# Altium PCB PCB1.PcbDoc
Units mil, origin at the board's own origin, x right, y up, seen from the top; angles counter-clockwise.
Board outline 5290.03 x 4800.03 mil, 2 copper layers (Top Layer, Bottom Layer); 69 components, 54 nets, 202 pads, 42 vias.
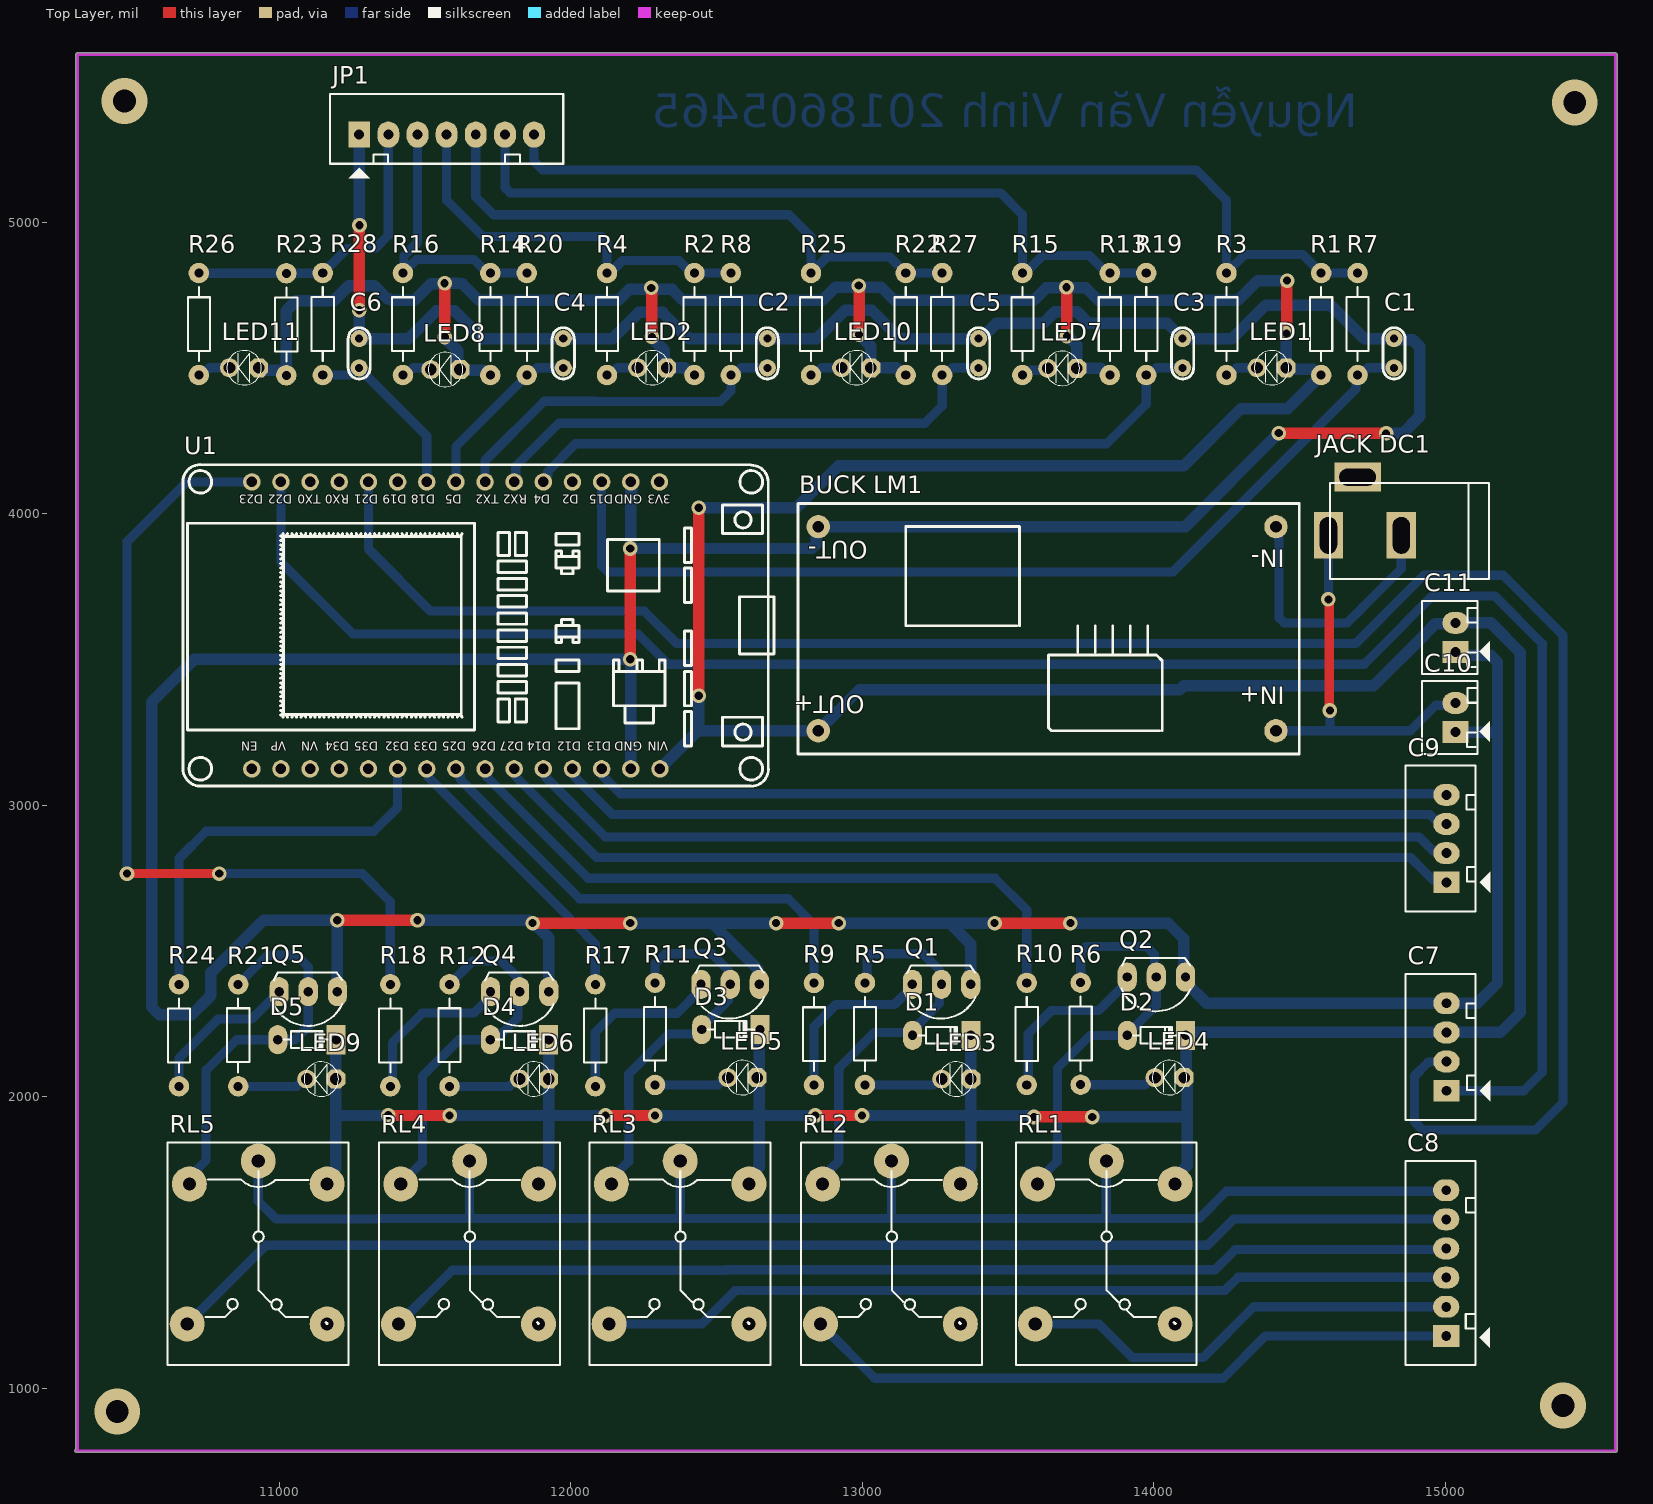
[diagram p0: Top Layer view]
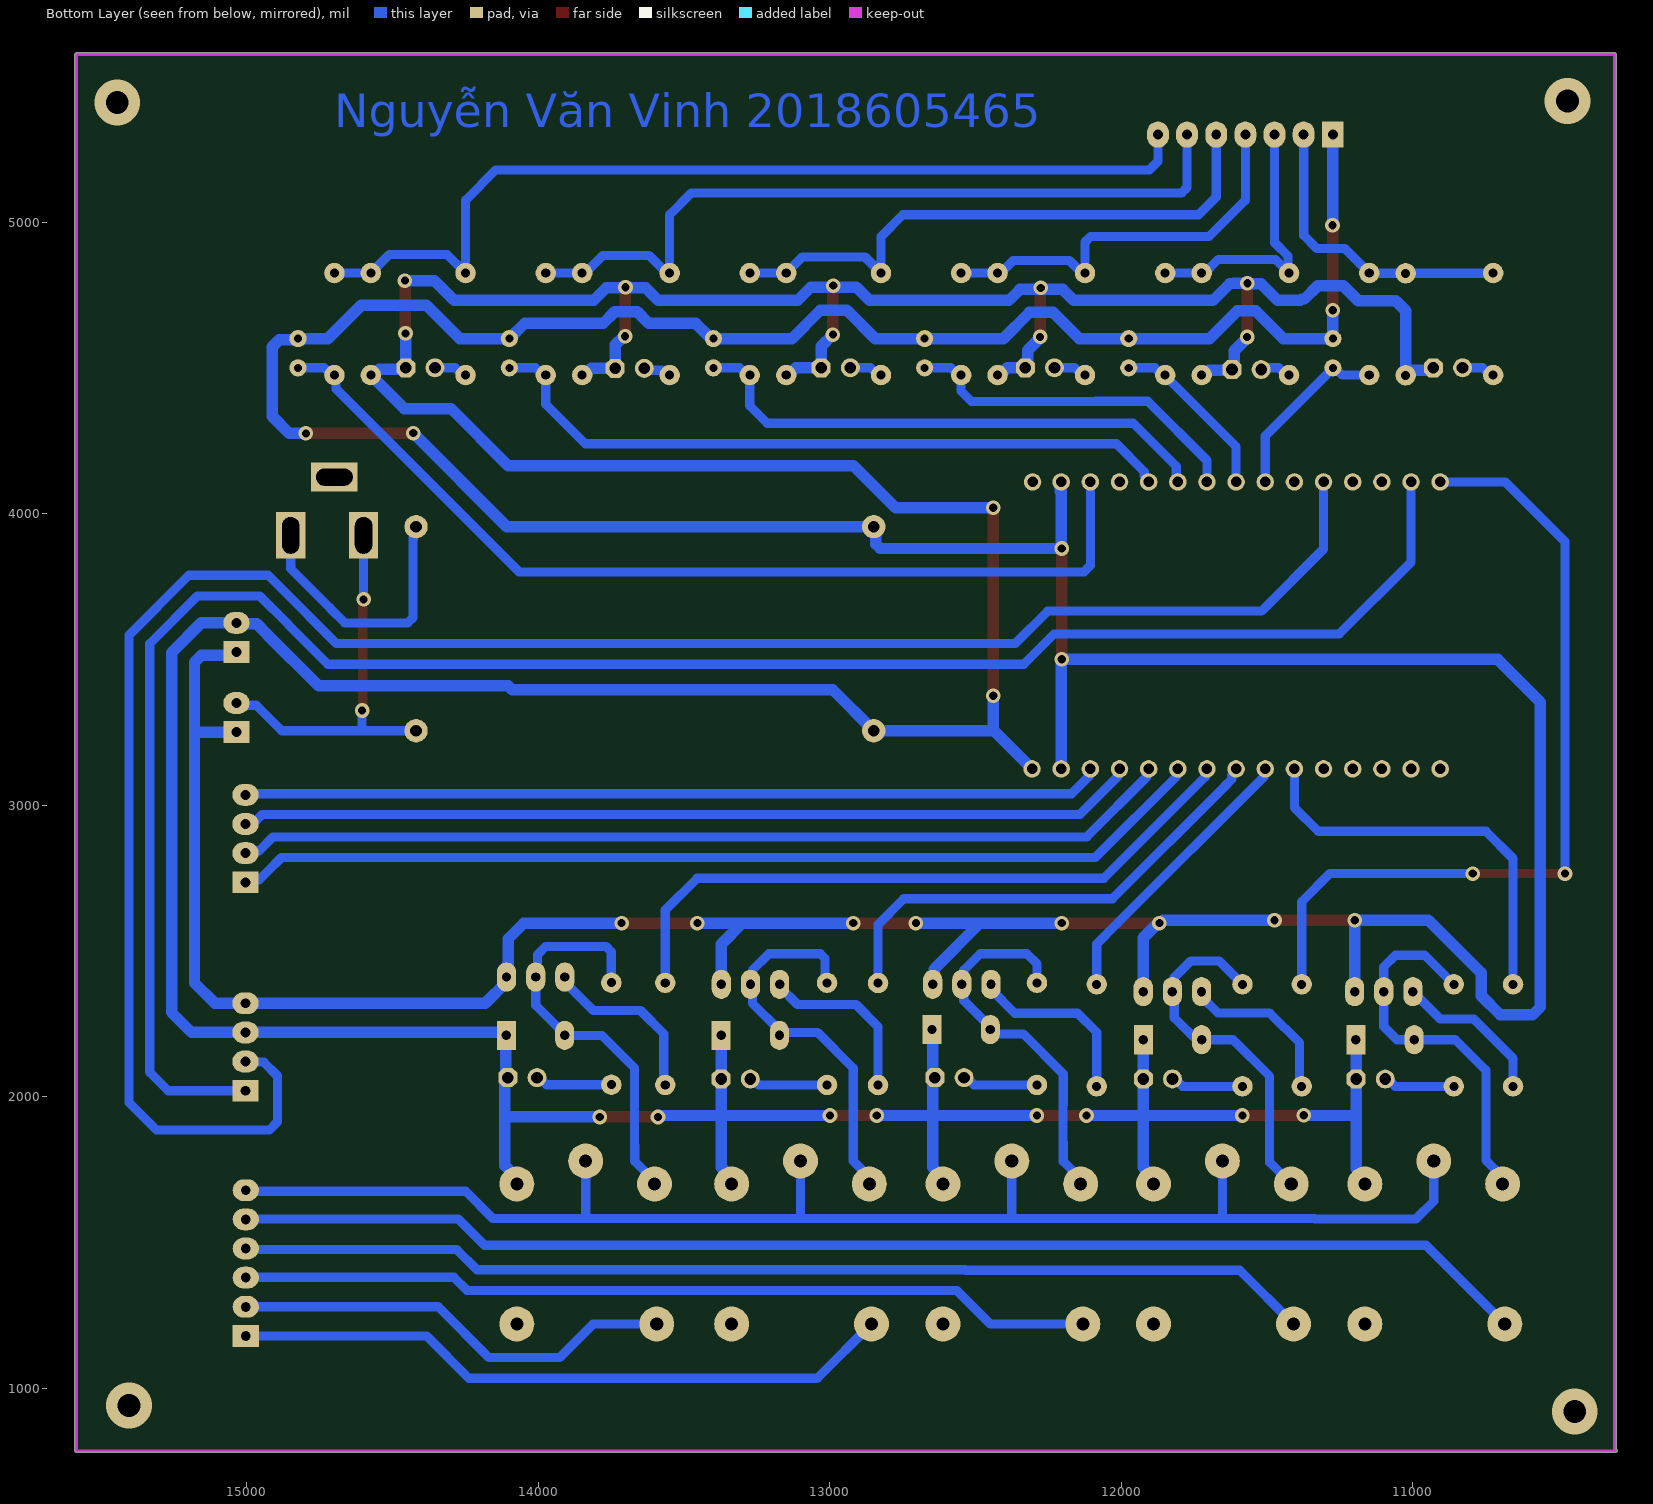
[diagram p1: Bottom Layer view, seen from below]
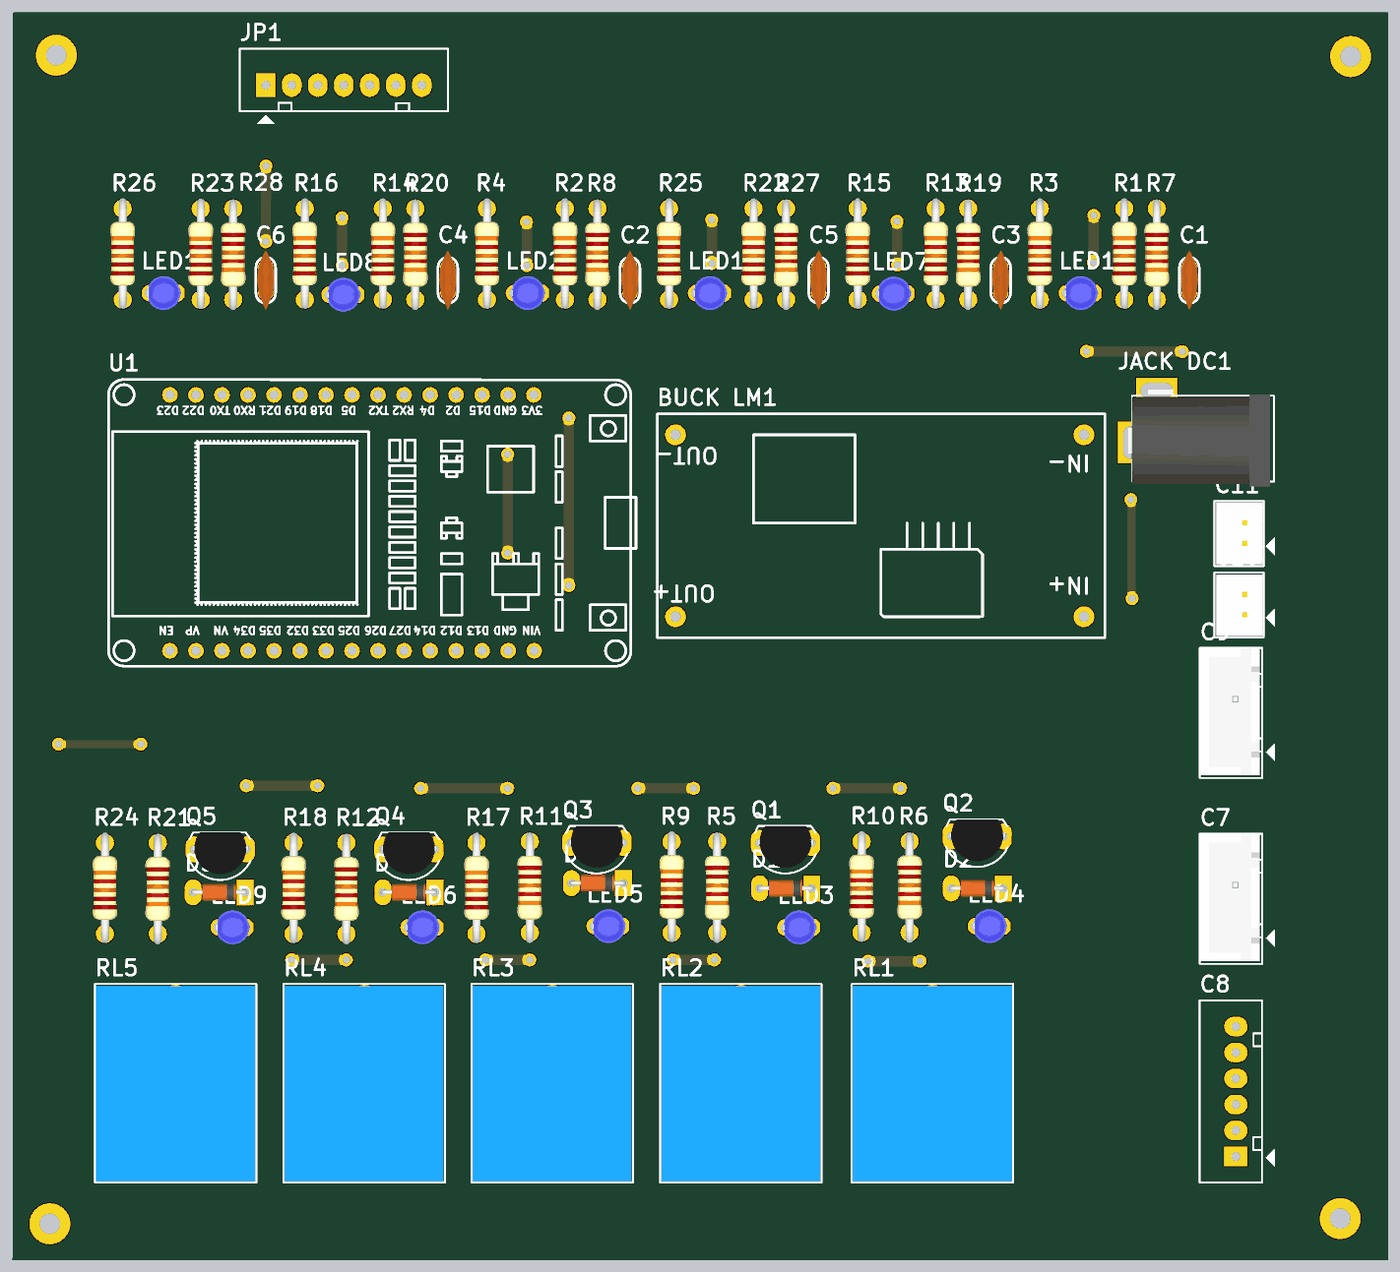
[diagram p2: 3D render of the assembled board from above, using the file's embedded part models]

## Layer stack, top to bottom
Top Solder: solder mask 0.4, Solder Resist, Dk 3.5
Top Layer: signal copper 1.4
Dielectric 1: dielectric 12.6, FR-4, Dk 4.8
Bottom Layer: signal copper 1.4
Bottom Solder: solder mask 0.4, Solder Resist, Dk 3.5

## Board outline
10302.98,789.59 ccw(c10305,785) 10305,779.99 15585,779.99 ccw(c15585,785) 15590.01,785 15590.01,5575 ccw(c15585,5575) 15585,5580.02 10308,5580.02 ccw(c10308,5575) 10302.99,5575

## Design rules (kind name [scope] priority, off if disabled: settings)
Clearance [All] p1: gap=39.37 ignorepadtopadclearanceinfootprint=FALSE
PolygonConnect [All] p1: connectstyle=Relief reliefconductorwidth=10 reliefentries=4 polygonreliefangle="90 Angle" airgapwidth=10
RoutingVias [All] p1: holewidth=28 width=50 viastyle="Through Hole" minholewidth=28 minwidth=50 maxholewidth=28 maxwidth=50
SolderMaskExpansion [All] p1: expansion=4 istentingtop=FALSE
Width GND_ISO [InNet('GND_ISO')] p1: maxlimit=39.37 minlimit=39.37 preferedwidth=39.37
Width COM_O_1 [InNet('COM_O_1')] p2: maxlimit=59.06 minlimit=59.06 preferedwidth=59.06
Width COM_O_2 [InNet('COM_O_2')] p3: maxlimit=59.06 minlimit=59.06 preferedwidth=59.06
Width VCC_ISO [InNet('VCC5_ISO')] p4: maxlimit=39.37 minlimit=39.37 preferedwidth=39.37
Width GND [InNet('GND')] p5: maxlimit=39.37 minlimit=39.37 preferedwidth=39.37
Width VCC [InNet('VCC5')] p6: maxlimit=39.37 minlimit=39.37 preferedwidth=39.37
Width SIGNAL [All] p7: maxlimit=31.5 minlimit=31.5 preferedwidth=31.5
30 further rules are at their usual default settings.

## Components (designator, comment, footprint, x,y, rotation, side; value= is the part's Value field where it differs from the comment)
"BUCK LM1" "Buck LM2596" "BUCK LM2596" 13650,3575 r180 top
C1 "104" "tu gom" 14825,4550 r90 top
C2 "104" "tu gom" 12675,4550 r90 top
C3 "104" "tu gom" 14100,4550 r90 top
C4 "104" "tu gom" 11975,4550 r90 top
C5 "104" "tu gom" 13400,4550 r90 top
C6 "104" "tu gom" 11275,4550 r90 top
C7 "LCD_I2C" Header4 15005,2020 r90 top
C8 "Header6" Header6 15004,1178.74 r90 top
C9 "L298N IN" Header4 15005,2735 r90 top
C10 "Header2" Header2 15036,3250 r90 top
C11 "Header2" Header2 15036,3525 r90 top
D1 "100v" "DIODE 0.5A" 13273.22,2210 r180 top
D2 "100v" "DIODE 0.5A" 14010,2210 r180 top
D3 "100v" "DIODE 0.5A" 12550,2230 r180 top
D4 "100v" "DIODE 0.5A" 11825,2195 r180 top
D5 "100v" "DIODE 0.5A" 11095.78,2195 r180 top
"JACK DC1" "JACK DC 5.5" "JACK DC 5.5" 14725,4025 r180 top value="Jac DC"
JP1 "JP7" Header7 11275,5300 r0 top value="Connector 7"
LED1 "LED 3mm" LED-3MM-BLUE 14400,4500 r180 top
LED2 "LED 3mm" LED-3MM-BLUE 12275,4500 r180 top
LED3 "LED 3mm" LED-3MM-BLUE 13318.22,2060 r180 top
LED4 "LED 3mm" LED-3MM-BLUE 14050,2065 r180 top
LED5 "LED 3mm" LED-3MM-BLUE 12585,2065 r180 top
LED6 "LED 3mm" LED-3MM-BLUE 11870,2060.36 r180 top
LED7 "LED 3mm" LED-3MM-BLUE 13682,4498 r180 top
LED8 "LED 3mm" LED-3MM-BLUE 11566,4494 r180 top
LED9 "LED 3mm" LED-3MM-BLUE 11140,2060 r180 top
LED10 "LED 3mm" LED-3MM-BLUE 12975,4500 r180 top
LED11 "LED 3mm" LED-3MM-BLUE 10875,4500 r180 top
Q1 "C1815" C1815_cam 13272.72,2385 r180 top
Q2 "C1815" C1815_cam 14009.5,2410 r180 top
Q3 "C1815" C1815_cam 12547.72,2385 r180 top
Q4 "C1815" C1815_cam 11825.28,2360 r180 top
Q5 "C1815" C1815_cam 11100.28,2360 r180 top
R1 "10K" R1/4W 14575,4825 r270 top value="R1/4W - 1K"
R2 "10K" R1/4W 12425,4825 r270 top value="R1/4W - 1K"
R3 "220R" R1/4W 14250,4825 r270 top value="R1/4W - 1K"
R4 "220R" R1/4W 12125,4825 r270 top value="R1/4W - 1K"
R5 "510R" R1/4W 13010,2040 r90 top value="R1/4W - 1K"
R6 "510R" R1/4W 13750,2040.6 r90 top value="R1/4W - 1K"
R7 "1K" R1/4W 14700,4475 r90 top value="R1/4W - 1K"
R8 "1K" R1/4W 12550,4475 r90 top value="R1/4W - 1K"
R9 "510R" R1/4W 12835,2389.4 r270 top value="R1/4W - 1K"
R10 "510R" R1/4W 13565,2390 r270 top value="R1/4W - 1K"
R11 "510R" R1/4W 12290,2040 r90 top value="R1/4W - 1K"
R12 "510R" R1/4W 11585,2035 r90 top value="R1/4W - 1K"
R13 "10K" R1/4W 13850,4825 r270 top value="R1/4W - 1K"
R14 "10K" R1/4W 11725,4825 r270 top value="R1/4W - 1K"
R15 "220R" R1/4W 13550,4825 r270 top value="R1/4W - 1K"
R16 "220R" R1/4W 11425,4825 r270 top value="R1/4W - 1K"
R17 "510R" R1/4W 12085,2385 r270 top value="R1/4W - 1K"
R18 "510R" R1/4W 11381.68,2385 r270 top value="R1/4W - 1K"
R19 "1K" R1/4W 13975,4475 r90 top value="R1/4W - 1K"
R20 "1K" R1/4W 11850,4475 r90 top value="R1/4W - 1K"
R21 "510R" R1/4W 10860,2035 r90 top value="R1/4W - 1K"
R22 "10K" R1/4W 13150,4825 r270 top value="R1/4W - 1K"
R23 "10K" R1/4W 11025,4824.04 r270 top value="R1/4W - 1K"
R24 "510R" R1/4W 10656.68,2385 r270 top value="R1/4W - 1K"
R25 "220R" R1/4W 12825,4825 r270 top value="R1/4W - 1K"
R26 "220R" R1/4W 10725,4825 r270 top value="R1/4W - 1K"
R27 "1K" R1/4W 13275,4475 r90 top value="R1/4W - 1K"
R28 "1K" R1/4W 11150,4475 r90 top value="R1/4W - 1K"
RL1 "Relay" RELAY_SRA_05VDC_SL_C 13838,1778.74 r270 top
RL2 "Relay" RELAY_SRA_05VDC_SL_C 13101.22,1778.74 r270 top
RL3 "Relay" RELAY_SRA_05VDC_SL_C 12376.22,1778.74 r270 top
RL4 "Relay" RELAY_SRA_05VDC_SL_C 11653.78,1778.74 r270 top
RL5 "Relay" RELAY_SRA_05VDC_SL_C 10928.78,1778.74 r270 top
U1 "ESP32_MODULE copy" ESP32-WIFIMODULE-FOOTPRINT 11675,3700 r90 top

## Footprints (in the part's own frame and the unit in brackets; to place one, negate y for a bottom-side part, rotate by r counter-clockwise, add the part's x,y. Pads: shape width x height; smd on the part's side, far side on the other; paste and mask are expansions set on the pad)
"BUCK LM2596" [mil]
  round 80 hole 40: 1(-770,320) 2(-770,-380) 3(800,-380) 4(800,320)
  silkscreen extent -850,-460 870,400
C1815_cam [mil]
  oval 66x100 hole 32: 1(-100,0) 2(0,0) 3(100,0)
  silkscreen extent -117,-65 120,118, body extent -109,-66 109,95, height 245
"DIODE 0.5A" [mil] "Diode muoi, xung"
  oval 65x100 hole 32: 1(100,0)
  rect 65x100 hole 32: 2(-100,0)
  silkscreen extent -80,-30 80,28, body extent -108,-33 108,32, height 61
ESP32-WIFIMODULE-FOOTPRINT [mil]
  round 60 hole 36: 1(-575.9,768.25) 2(-575.9,668.25) 3(-575.9,568.25) 4(-575.9,468.25) 5(-575.9,368.25) 6(-575.9,268.25) 7(-575.9,168.25) 8(-575.9,68.25) 9(-575.9,-31.75) 10(-575.9,-131.75) 11(-575.9,-231.75) 12(-575.9,-331.75) 13(-575.9,-431.75) 14(-575.9,-531.75) 15(-575.9,-631.75) 16(408.35,-630.18) 17(408.35,-531.75) 18(408.35,-431.75) 19(408.35,-331.75) 20(408.35,-231.75) 21(408.35,-131.75) 22(408.35,-31.75) 23(408.35,68.25) 24(408.35,168.25) 25(408.35,268.25) 26(408.35,368.25) 27(408.35,468.25) 28(408.35,568.25) 29(408.35,668.25) 30(408.35,768.25)
  silkscreen extent -635,-1023 468,1005
Header2 [mil] "CON2"
  rect 75x90 hole 34: 1(0,0)
  oval 75x90 hole 34: 2(100,0)
  silkscreen extent -75,-118 175,115, body extent -68,-70 168,107, height 236
Header4 [mil] "CON4"
  rect 75x90 hole 34: 1(0,0)
  oval 75x90 hole 34: 2(100,0) 3(200,0) 4(300,0)
  silkscreen extent -100,-150 400,140, body extent -90,-90 398,136, height 276
Header6 [mil] "CON6"
  rect 75x90 hole 34: 1(0,0)
  oval 75x90 hole 34: 2(100,0) 3(200,0) 4(300,0) 5(400,0) 6(500,0)
  silkscreen extent -100,-150 600,140
Header7 [mil] "CON7"
  rect 75x90 hole 34: 1(0,0)
  oval 75x90 hole 34: 2(100,0) 3(200,0) 4(300,0) 5(400,0) 6(500,0) 7(600,0)
  silkscreen extent -100,-150 700,140
"JACK DC 5.5" [mil] "Jac DC input"
  rect 100x160 hole 59.06 slot 125.98 at 90 deg: 1(125,100) 2(-125,100)
  rect 160x100 hole 59.06 slot 125.98 at 0 deg: 3(25,-100)
  silkscreen extent -425,-80 120,250, body extent -410,-105 134,269, height 434
LED-3MM-BLUE [mil]
  oct 65x65 hole 40: 1(-55,0)
  round 65 hole 40: 2(45,0)
  silkscreen extent -64,-59 54,59, body extent -72,-65 54,65, height 184
R1/4W [mil]
  round 70 hole 31: 1(0,0) 2(350,0)
  silkscreen extent 48,-38 302,38, body extent -40,-47 386,47, height 111
RELAY_SRA_05VDC_SL_C [mil] "Relay SPDT, 5 pin, 10A,W 650mil, L 800mil, H 800mil"
  round 120 hole 45: 1(559.06,-243.78) 2(559.06,236.22) 3(78.74,236.22) 4(0,0) 5(78.74,-236.22)
  silkscreen extent -63,-311 700,310, body extent -55,-306 697,304, height 602
"tu gom" [mm] "Tu gom mini"
  round 1.5 hole 0.7: 1(-1.27,0) 2(1.27,0)
  silkscreen extent -2.25,-0.97 2.22,0.97, body extent -2.92,-0.85 2.92,0.85, height 6.12

## Part data
C1 C2 C3 C4 C5 C6: library part "Tu gom 104 50V", "Cắm", Chung_Loai=Cắm, Don_Vi=Con, Ma_Hang=MH004761, So_Chan=2, Ten_Linh_Kien="Tụ gốm 104 100nF 50V"
C7 C9: library part Header4, "Header IDC, 4 x 1 Pin Vertical 2.54mm Pitch (Non-Boxed, Male)", Manufacturer="W¨¹rth Elektronik eiSos GmbH", partNo=613002143121, ComponentLink1 Description=Manufacturer, ComponentLink1URL=http://www.we-online.com, ComponentLink2 Description=Datasheet, ComponentLink2URL=http://katalog.we-online.de/em/datasheet/6130xx143121.pdf, Created by="Karrer Zheng", Created Date="29 March 2013", NoPins=02
C8: "Header IDC, 6 x 1 Pin Vertical 2.54mm Pitch (Non-Boxed, Male)", Manufacturer="W¨¹rth Elektronik eiSos GmbH", partNo=613002143121, ComponentLink1 Description=Manufacturer, ComponentLink1URL=http://www.we-online.com, ComponentLink2 Description=Datasheet, ComponentLink2URL=http://katalog.we-online.de/em/datasheet/6130xx143121.pdf, Created by="Karrer Zheng", Created Date="29 March 2013", NoPins=02
C10 C11: "Header IDC, 2 x 1 Pin Vertical 2.54mm Pitch (Non-Boxed, Male)", Manufacturer="W¨¹rth Elektronik eiSos GmbH", partNo=613002143121, ComponentLink1 Description=Manufacturer, ComponentLink1URL=http://www.we-online.com, ComponentLink2 Description=Datasheet, ComponentLink2URL=http://katalog.we-online.de/em/datasheet/6130xx143121.pdf, Created by="Karrer Zheng", Created Date="29 March 2013", NoPins=02
D1 D2 D3 D4 D5: library part "Diode 1N4148", "Cắm", Chung_Loai=Cắm, Don_Vi=Con, Ma_Hang=MH001065, Ten_Linh_Kien="Diode 1N4148 DO35 450mA 100V ( 1N4148 DIP)"
JP1: library part Header7, "Connector 7"
LED1 LED2 LED3 LED4 LED5 LED6 LED7 LED8 LED9 LED10 LED11: library part "LED 3mm Xanh Duong", "Cắm", Chung_Loai=Cắm, Don_Vi=Con, Ma_Hang=MH009003, Ten_Linh_Kien="LED 3MM Xanh Dương SS (1000c)"
Q1 Q2 Q3 Q4 Q5: "NPN 600mW, ECB"
R1 R2 R3 R4 R5 R6 R7 R8 R9 R10 R11 R12 R13 R14 R15 R16 R17 R18 R19 R20 R21 R22 R23 R24 R25 R26 R27 R28: library part R1/4W, "Resistor 1/4W"
RL1 RL2 RL3 RL4 RL5: library part RL_SRA-05VDC-SL-C, "Relay 5 Chan", Ma_Hang=MH009374, Ten="Relay 5V10A SRD-05VDC-SL-C Chính Hãng"

## Via types
v1: diameter 50, hole 28, Top Layer to Bottom Layer, 38 vias
v2: diameter 157.48, hole 78.74, Top Layer to Bottom Layer, 4 vias

## Nets (pads, with @x,y where several pads share a name; then routed paths per layer and width w, separated by ;. In a path a pad name is that pad's centre, name@x,y a point inside that pad or via, vN(x,y) a via of type N, cw(c..) or ccw(c..) an arc to the next point about the centre after c; other vN are vias at no path point)
COM_O: C8.6 RL1.4 RL2.4 RL3.4 RL4.4 RL5.4 | length 5066.8
  Bottom Layer w31.5: RL5.4 10928.78,1641.22 10990,1580 11336.02,1580 11337.76,1581.73 11653.78,1581.73 ; RL4.4 11653.78,1581.73 ; RL3.4 12376.22,1581.73 ; RL2.4 13101.22,1581.73 ; RL1.4 13838,1584.88 13834.85,1581.73 ; C8.6@15004,1675 14250,1675 14156.73,1581.73 13834.85,1581.73 ; 11653.78,1581.73 12376.22,1581.73 ; 12376.22,1581.73 13101.22,1581.73 ; 13101.22,1581.73 13834.85,1581.73
GND: "BUCK LM1.3" C1.2 C2.2 C3.2 C4.2 C5.2 C6.2 C7.4 C10.1 C11.1 JP1.1 Q1.1 Q2.1 Q3.1 Q4.1 Q5.1 U1.14 U1.17 | length 19112.7
  Top Layer w39.37: v1(11200,2605) v1(11475,2605) ; v1(11275.12,4697.25) 11275.12,4859.12 11276,4860 v1(11276,4989.12) ; v1(11870,2595) v1(12205,2595) ; v1(12205,3500) v1(12205,3880.12) ; v1(12705,2595) v1(12920,2595) ; v1(13455,2595) v1(13715,2595) ; v1(14429.47,4275.94) 14429.94,4275.47 14797.4,4275.47 v1(14797.88,4275)
  Bottom Layer w39.37: Q5.1 11200.28,2604.72 v1(11200,2605) 10946.99,2605 10765.94,2423.96 10765.94,2345.94 10700,2280 10590,2280 10562.62,2307.38 10562.62,3352.62 10710,3500 v1(12205,3500) 12205.88,3499.12 12205.88,3124.97 U1.14 ; JP1.1 11275.5,5299.5 11275.5,4989.62 v1(11276,4989.12) ; v1(11275.12,4697.25) 11275,4697.13 C6.2 11444.37,4600 11539.37,4695 11603,4695 11698,4600 C4.2 12144.37,4600 12234.42,4690.06 12315.58,4690.06 12405.63,4600 C2.2 12844.37,4600 12942.42,4698.06 13032.58,4698.06 13130.63,4600 C5.2 13405.33,4600 C5.2@13409.09,4603.77 ; v1(11475,2605) 11857.12,2605 11867.12,2595 11872.88,2595 11878.19,2589.69 11880.31,2589.69 11925.28,2544.72 Q4.1 ; v1(12205,2595) 12485.13,2595 ; 12205.88,4076.88 12205.88,3880.99 v1(12205,3880.12) 12826.94,3880.12 12842.23,3895.41 12842.23,3947.23 12850,3955 14108.53,3955 v1(14429.47,4275.94) ; U1.17 12210.7,4104.4 12210.7,4076.88 ; Q3.1 12642.63,2390.1 12642.63,2437.5 12485.13,2595 ; v1(12705,2595) 12485.13,2595 ; v1(12920,2595) 13300,2595 ; Q1.1 13372.72,2522.28 13300,2595 ; C5.2@13417.84,4609.84 13460.2,4652.2 13621.57,4652.2 13661.37,4692 13738.63,4692 13778.43,4652.2 14047.8,4652.2 C3.2 14269.37,4600 14384.31,4714.94 14608.06,4714.94 14723,4600 C1.2 14828.77,4596.23 14889.29,4596.23 14913.58,4571.94 14913.58,4333.58 14855,4275 v1(14797.88,4275) ; v1(13455,2595) 13300,2595 ; v1(13715,2595) 14050,2595 14104.4,2540.6 14104.4,2415.1 Q2.1 14109.5,2393 14182.5,2320 15110,2320 15179.92,2389.92 15179.92,3250 ; C10.1 15179.92,3250 ; C11.1 15047.64,3513.36 15156.86,3513.36 15179.92,3490.3 15179.92,3250
IN_1: C1.1 R7.1 U1.18 | length 3328.3
  Bottom Layer w31.5: U1.18 12106.75,3821.7 12128.45,3800 14066.83,3800 14694.26,4427.43 14694.26,4469.26 R7.1 14710.42,4475 14735.42,4500 C1.1
IN_2: C3.1 R19.1 U1.20 | length 2426
  Bottom Layer w31.5: U1.20 11906.75,4116.06 11921.63,4130.94 11921.63,4143.6 12017.16,4239.13 13839.13,4239.13 13975,4375 R19.1 13985.42,4475 14010.42,4500 C3.1
IN_3: C5.1 R27.1 U1.21 | length 1845.3
  Bottom Layer w31.5: U1.21 11812.21,4113.8 11812.21,4162.21 11960,4310 13215,4310 13275,4370 R27.1 13285.42,4475 13310.42,4500 C5.1
IN_4: C2.1 R8.1 U1.22 | length 1205.8
  Bottom Layer w31.5: U1.22 11706.75,4181.75 11910,4385 12087.55,4385 12087.67,4384.88 12514.88,4384.88 12550,4420 R8.1 12560.42,4475 12585.42,4500 C2.1
IN_5: C4.1 R20.1 U1.23 | length 602.8
  Bottom Layer w31.5: U1.23 11606.75,4229.31 11850,4472.55 R20.1 11860.42,4475 11885.42,4500 C4.1
IN_6: C6.1 R28.1 U1.24 | length 623
  Bottom Layer w31.5: R28.1 11242.54,4475 11267.54,4500 C6.1 11275,4497.55 11506.75,4265.8 U1.24
L298_INA: C9.4 U1.13 | length 2925.2
  Bottom Layer w31.5: U1.13 12112.21,3118.64 12112.21,3098.27 12121.63,3088.84 12171.49,3038.98 C9.4@14984.73,3038.98
L298_INB: C9.3 U1.12 | length 3088.6
  Bottom Layer w31.5: U1.12 12012.21,3118.64 12012.21,3098.05 12142.14,2968.11 14947.41,2968.11 14953.79,2961.73 14954.01,2961.73 14972.41,2943.32 14996.68,2943.32 C9.3
L298_INC: C9.2 U1.11 | length 3230.2
  Bottom Layer w31.5: U1.11 11912.21,3118.64 11912.21,3097.83 12119.17,2890.87 14910.65,2890.87 14958.19,2843.32 14977.4,2843.32 14985.73,2835 C9.2
L298_IND: C9.1 U1.10 | length 3371.7
  Bottom Layer w31.5: U1.10 11812.21,3118.64 11812.21,3097.61 12089.81,2820 14881.3,2820 14929.78,2771.52 14930,2771.52 14959.14,2742.38 14997.62,2742.38 C9.1
"NetBUCK LM1_2": "BUCK LM1.2" "JACK DC1.2" | length 934.6
  Bottom Layer w31.5: 14420,3955 14429.28,3945.72 14429.28,3913.02 14430,3912.3 14430,3643.45 14448.45,3625 14664.38,3625 14715.41,3676.03 14715.41,3676.65 14850,3811.24 14850,3925
NetD1_1: D1.1 Q1.2 R5.2 RL2.5 | length 1341.6
  Bottom Layer w31.5: RL2.5 12865,1723.95 12919.88,1778.83 12919.88,2097.33 13042.55,2220 13163.22,2220 D1.1 13173.22,2227.5 13266.12,2320.4 13266.12,2378.4 Q1.2 13266.12,2391.6 13266.12,2433.22 13209.22,2490.12 13033.45,2490.12 13017.37,2474.04 13017.37,2417.37 R5.2@13010,2410
NetD2_1: D2.1 Q2.2 R6.2 RL1.5 | length 1414.6
  Bottom Layer w31.5: RL1.5 13601.78,1710 13669.88,1778.1 13669.88,1833.1 13670.12,1833.34 13670.12,2097.56 13782.55,2210 D2.1 13910,2218.43 13925.48,2233.91 13930.65,2233.91 14009.5,2312.76 Q2.2 14002.9,2416.6 14002.9,2487.1 13974.88,2515.12 13768.45,2515.12 13750,2496.67 R6.2
NetD3_1: D3.1 Q3.2 R11.2 RL3.5 | length 1316.1
  Bottom Layer w31.5: RL3.5 12140,1717.7 12199.88,1777.58 12199.88,1842.58 12200.12,1842.82 12200.12,1972.46 12199.88,1972.69 12199.88,2077.33 12337.55,2215 12434.52,2215 12450,2230.48 12450,2238.43 12541.12,2329.55 12541.12,2378.4 Q3.2 12541.12,2391.6 12541.12,2433.22 12484.22,2490.12 12325.12,2490.12 12290,2455 R11.2
NetD4_1: D4.1 Q4.2 R12.2 RL4.5 | length 1238.6
  Bottom Layer w31.5: RL4.5 11491.78,1774.22 11491.78,2069.22 11617.55,2195 D4.1 ; R12.2 11665.12,2465.12 11761.78,2465.12 11818.68,2408.22 11818.68,2366.6 Q4.2 11818.68,2353.4 11818.68,2270.4 D4.1@11734.14,2185.86
NetD5_1: D5.1 Q5.2 R21.2 RL5.5 | length 1329.1
  Bottom Layer w31.5: RL5.5 10692.56,1723.95 10750,1781.39 10750,2090 10855,2195 D5.1 11055,2195 11100.28,2240.28 Q5.2 11100.28,2444.72 11060,2485 10960,2485 R21.2
NetLED1_2: LED1.2 R3.2 | length 115.4
  Bottom Layer w31.5: R3.2 14260.42,4475 14285.42,4500 LED1.2
NetLED2_2: LED2.2 R4.2 | length 115.4
  Bottom Layer w31.5: R4.2 12135.42,4475 12160.42,4500 LED2.2
NetLED3_2: LED3.2 R5.1 | length 271.5
  Bottom Layer w31.5: R5.1 13244.15,2040 13264.15,2060 LED3.2
NetLED4_2: LED4.2 R6.1 | length 265.1
  Bottom Layer w31.5: R6.1 13971.53,2040.6 13995.93,2065 LED4.2
NetLED5_2: LED5.2 R11.1 | length 260.4
  Bottom Layer w31.5: R11.1 12505.93,2040 12530.93,2065 LED5.2
NetLED6_2: LED6.2 R12.1 | length 251.7
  Bottom Layer w31.5: R12.1@11585.87,2035.87 R12.1 11790.58,2035 11815.93,2060.36 LED6.2
NetLED7_2: LED7.2 R15.2 | length 96.5
  Bottom Layer w31.5: R15.2 13560.42,4475 13577.01,4491.59 13630.59,4491.59 LED7.2
NetLED8_2: LED8.2 R16.2 | length 106.3
  Bottom Layer w31.5: R16.2 11435.42,4475 11460.42,4500 LED8.2@11520.93,4500
NetLED9_2: LED9.2 R21.1 | length 245.4
  Bottom Layer w31.5: R21.1 11060.93,2035 11085.93,2060 LED9.2
NetLED10_2: LED10.2 R25.2 | length 115.4
  Bottom Layer w31.5: R25.2 12835.42,4475 12860.42,4500 LED10.2
NetLED11_2: LED11.2 R26.2 | length 115.4
  Bottom Layer w31.5: R26.2 10735.42,4475 10760.42,4500 LED11.2
NetQ1_3: Q1.3 R9.2 | length 587.5
  Bottom Layer w31.5: R9.2@12835,2055 12835,2240 12910.7,2315.7 13111.54,2315.7 13172.72,2376.88 Q1.3
NetQ2_3: Q2.3 R10.2 | length 592.3
  Bottom Layer w31.5: R10.2@13565,2055 13570,2060 13570,2215 13650,2295 13811.5,2295 13909.5,2393 Q2.3
NetQ3_3: Q3.3 R17.2 | length 601
  Bottom Layer w31.5: R17.2@12085,2060 12085,2220 12150.87,2285.87 12365.59,2285.87 12447.72,2368 Q3.3
NetQ4_3: Q4.3 R18.2 | length 571.2
  Bottom Layer w31.5: R18.2 11389.05,2042.37 11389.05,2184.05 11491.26,2286.26 11668.54,2286.26 11725.28,2343 Q4.3
NetQ5_3: Q5.3 R24.2 | length 538.9
  Bottom Layer w31.5: R24.2 10656.68,2130.89 10791.65,2265.87 10906.15,2265.87 10976.68,2336.4 10984.34,2336.4 11000.28,2352.34 Q5.3
OUT_1: R9.1 U1.8 | length 1647.1
  Bottom Layer w31.5: U1.8 11606.75,3116.38 11621.63,3101.5 11621.63,3088.84 11646.73,3063.74 11646.73,3062.64 12031.1,2678.27 12746.73,2678.27 12835,2590 R9.1@12835,2405
OUT_2: R17.1 U1.7 | length 978.6
  Bottom Layer w31.5: U1.7 11512.21,3118.64 11512.21,3096.1 12014.15,2594.15 12085,2523.3 R17.1
OUT_3: R24.1 U1.6 | length 1386.6
  Bottom Layer w31.5: R24.1 10656.68,2816.68 10750,2910 11325,2910 11406.75,2991.75 U1.6
OUT_4: R10.1 U1.9 | length 2306.2
  Bottom Layer w31.5: U1.9 11712.21,3118.64 11712.21,3097.39 12060.46,2749.13 13455.87,2749.13 13565,2640 R10.1@13565,2405
OUT_5: R18.1 U1.30 | length 2878.1
  Top Layer w31.5: v1(10478.57,2765) v1(10795,2765)
  Bottom Layer w31.5: v1(10478.57,2765) 10478.57,3903.57 10683.35,4108.35 U1.30 ; v1(10795,2765) 11285,2765 11381.47,2668.53 11381.47,2385.21 R18.1
OUT_BTN_1: JP1.7 R1.1 R3.1 R7.2 | length 3275.3
  Bottom Layer w31.5: JP1.7 11875,5207.76 11903.88,5178.88 14146.12,5178.88 14250,5075 R3.1 14314,4889 14511,4889 R1.1 R7.2
OUT_BTN_2: JP1.6 R13.1 R15.1 R19.2 | length 2670
  Bottom Layer w31.5: JP1.6 11775,5118.45 11793.45,5100 13475,5100 13550,5025 R15.1 13560.42,4825 13620.42,4885 13779.58,4885 13839.58,4825 R19.2
OUT_BTN_3: JP1.5 R22.1 R25.1 R27.2 | length 2040.9
  Bottom Layer w31.5: JP1.5 11675,5085.98 11735.98,5025 12750,5025 12825,4950 R25.1 12880,4880 13095,4880 R22.1 R27.2
OUT_BTN_4: JP1.4 R2.1 R4.1 R8.2 | length 1391.2
  Bottom Layer w31.5: JP1.4 11575,5075 11700,4950 12106.55,4950 12125,4931.55 R4.1 ; R4.1@12135.42,4825 12178.42,4868 12371.58,4868 12414.58,4825 R8.2
OUT_BTN_5: JP1.3 R14.1 R16.1 R20.2 | length 955.1
  Bottom Layer w31.5: R16.1 R16.1@11428.24,4828.24 ; JP1.3 11475,4930 11428.24,4883.24 R16.1@11428.24,4828.24 ; R20.2 11714.58,4825 11667.58,4872 11472,4872 R16.1@11428.24,4828.24
OUT_BTN_6: JP1.2 R23.1 R26.1 R28.2 | length 1050.1
  Bottom Layer w31.5: R26.1 10725.48,4824.52 11024.52,4824.52 R23.1 11025.48,4824.52 11149.52,4824.52 R28.2 11234,4909 11329.78,4909 11375,4954.22 JP1.2
OUT_RL1: C8.1 RL2.1 | length 2283.7
  Bottom Layer w31.5: RL2.1 13043.43,1033.7 14238.7,1033.7 14383.74,1178.74 C8.1
OUT_RL2: C8.3 RL3.1 | length 2915
  Bottom Layer w31.5: RL3.1 12449.64,1219.68 12564.76,1334.8 14244.8,1334.8 14290,1380 C8.3@14981.08,1380
OUT_RL3: C8.5 RL5.1 | length 4468.2
  Bottom Layer w31.5: RL5.1 10955.32,1490 14185,1490 14275,1580 C8.5@15004,1580
OUT_RL4: C8.2 RL1.1 | length 1529.6
  Bottom Layer w31.5: RL1.1 13812.48,1219.68 13927.6,1104.57 14169.57,1104.57 14343.74,1278.74 C8.2
OUT_RL5: C8.4 RL4.1 | length 3699.8
  Bottom Layer w31.5: RL4.1 11594.45,1404.13 12533.87,1404.13 12535.4,1405.67 14210.67,1405.67 14280,1475 C8.4@15004,1475
SCL: C7.1 U1.29 | length 6737.2
  Bottom Layer w31.5: U1.29 11006.75,3833.25 11252.69,3587.31 12230.99,3587.31 12335.04,3483.27 14723.09,3483.27 14857.14,3617.32 14857.14,3617.95 14956.81,3717.62 15169.75,3717.62 15333.46,3553.9 15333.46,2083.46 15270,2020 C7.1
SDA: C7.2 U1.26 | length 7096
  Bottom Layer w31.5: U1.26 11306.75,3878.25 11519.8,3665.2 12253.32,3665.2 12364.39,3554.13 14693.73,3554.13 14786.28,3646.68 14786.28,3647.3 14927.46,3788.48 15199.1,3788.48 15404.33,3583.25 15404.33,1979.33 15310,1885 14923.45,1885 14895,1913.45 14895,2070.45 14942.6,2118.05 15003.05,2118.05 C7.2
VCC5: "BUCK LM1.4" C7.3 C11.2 D1.2 D2.2 D3.2 D4.2 D5.2 LED1.1 LED2.1 LED3.1 LED4.1 LED5.1 LED6.1 LED7.1 LED8.1 LED9.1 LED10.1 LED11.1 R1.2 R2.2 R13.2 R14.2 R22.2 R23.2 RL1.3 RL2.3 RL3.3 RL4.3 RL5.3 U1.15 | length 20307.9
  Top Layer w39.37: v1(11374.71,1935.87) 11375.58,1935 v1(11585,1935) ; v1(11568,4790) 11568.48,4789.52 11568.48,4606.2 v1(11568.96,4605.72) ; v1(12120,1935) v1(12290,1935) ; v1(12277,4774.11) 12279,4772.11 v1(12279,4606) ; v1(12440,3375) v1(12440,4020) ; v1(12839.76,1935) v1(13000,1935) ; v1(12989,4782.11) 12990,4781.11 v1(12990,4614) ; v1(13590,1930) v1(13790,1930) ; v1(13701.33,4776.06) 13702.17,4775.22 13702.17,4608.78 v1(13703,4607.94) ; v1(14456,4618) 14457,4619 14457,4798 v1(14458,4799)
  Bottom Layer w39.37: LED11.1 10938.1,4491.9 10998.85,4491.9 11016.71,4474.04 R23.2 11025,4696 11058.99,4729.99 11188,4729.99 11239.43,4781.42 11326.83,4781.42 11372.25,4736 11380.99,4736 11386.04,4730.94 11463.96,4730.94 11520.98,4787.97 11565.38,4787.97 11568,4790.59 11614.33,4790.59 11615.77,4789.14 11627.84,4789.14 11686.04,4730.94 12163.96,4730.94 12201.81,4768.8 12348.19,4768.8 12386.04,4730.94 12863.96,4730.94 12909.81,4776.8 13065.19,4776.8 13111.04,4730.94 13588.96,4730.94 13632.04,4774.02 13699.3,4774.02 v1(13701.33,4776.06) ; RL5.3 11165,1721.82 11195,1751.82 11195,1935 ; D5.2 11195.39,2194.61 11195.39,2060.39 LED9.1 11195,1935 ; v1(11374.71,1935.87) 11373.84,1935 11195,1935 ; v1(11568.96,4605.72) 11568.96,4602.85 11612.9,4558.91 11612.9,4506.81 11617.92,4501.8 11628.2,4501.8 11638.1,4491.9 11699.81,4491.9 11716.71,4475 R14.2 ; v1(11585,1935) 11925,1935 ; RL4.3 11890,1721.82 11925,1756.82 11925,1935 ; D4.2 LED6.1 11925,1935 ; v1(12120,1935) 11925,1935 ; v1(12279,4606) 12279,4603.12 12321.9,4560.22 12321.9,4508.1 LED2.1 12391.71,4500 12416.71,4475 R2.2 ; v1(12290,1935) 12648.22,1935 ; U1.15 12437.66,3255 ; v1(12440,3375) 12440,3257.34 12437.66,3255 ; v1(12440,4020) 12774.91,4020 12919.25,4164.33 14104.33,4164.33 14300,4360 14460,4360 R1.2 14566.71,4475 14546.56,4495.16 14459.84,4495.16 LED1.1 14455,4617 v1(14456,4618) ; RL3.3 12612.44,1721.82 12648.22,1757.6 12648.22,1935 ; D3.2@12648.22,2185 12648.22,1935 ; v1(12839.76,1935) 12648.22,1935 ; v1(12990,4614) 13030,4574 LED10.1 13116.71,4500 13141.71,4475 R22.2 ; v1(13000,1935) 13373.22,1935 ; RL2.3 13337.44,1721.82 13373.22,1757.6 13373.22,1935 ; D1.2 LED3.1 13373.22,1935 ; v1(13590,1930) 13585,1935 13373.22,1935 ; v1@13701.33,4775.04 13702.35,4774.02 13767.96,4774.02 13811.04,4730.94 14288.96,4730.94 14357.01,4799 v1(14458,4799) ; v1(13703,4607.94) 13705.03,4605.91 13709.41,4605.91 13736.29,4579.03 13736.29,4510.81 13737,4510.11 LED7.1 13818.71,4498 13841.71,4475 R13.2 ; v1(13790,1930) 14115,1930 ; RL1.3 14074.22,1721.82 14115,1762.6 14115,1930 ; 12437.66,3255 12850,3255 12990,3395 14090,3395 14103.46,3408.46 14754.07,3408.46 14931.94,3586.34 14931.94,3586.96 14966.54,3621.56 15032.56,3621.56 C11.2 15156.58,3625 15258.66,3522.91 15258.66,2288.66 15190,2220 C7.3 14120,2220 D2.2 14112.5,2207.5 14112.5,2062.5 14115,2060 14115,1930
VCC12: "BUCK LM1.1" "JACK DC1.1" C10.2 | length 1327.4
  Top Layer w31.5: v1(14600,3705.71) 14602.5,3703.21 14602.5,3326.91 v1(14605,3324.41)
  Bottom Layer w31.5: 14420,3255 14605,3255 ; v1(14600,3705.71) 14600,3925 ; v1(14605,3324.41) 14605,3255 ; C10.2 15028.62,3342.62 14968.17,3342.62 14880.55,3255 14605,3255
pads on no net: "JACK DC1.3" RL1.2 RL2.2 RL3.2 RL4.2 RL5.2 U1.1 U1.2 U1.3 U1.4 U1.5 U1.16 U1.19 U1.25 U1.27 U1.28
copper on no net:
  other v2: 10445,920 15405,940 15445,5410 10470,5415

## Keep-outs
Keep-Out Layer:
  lines w10: 10305,785 15585,785 15585,5575 15380,5575 10308,5575 10308,785

## Other copper
Bottom Layer:
  text "Nguyễn Văn Vinh 2018605465" at 14700,5287.17 h196.85

## Text inside footprints (layer, text, board x,y; h text height)
"BUCK LM1": Top Overlay "IN+" at 14450,3405 h60 r180; Top Overlay "IN-" at 14450,3875 h60 r180; Top Overlay "OUT+" at 13010,3375 h60 r180; Top Overlay "OUT-" at 13020,3905 h60 r180
U1: Top Overlay "VIN" at 12335.89,3217.6 h29.53 r180; Top Overlay "GND" at 12245.34,3217.6 h29.53 r180; Top Overlay "D13" at 12139.04,3217.6 h29.53 r180; Top Overlay "D12" at 12036.68,3217.6 h29.53 r180; Top Overlay "D14" at 11934.31,3217.6 h29.53 r180; Top Overlay "D27" at 11839.82,3217.6 h29.53 r180; Top Overlay "D26" at 11745.34,3217.6 h29.53 r180; Top Overlay "D25" at 11642.97,3217.6 h29.53 r180; Top Overlay "D33" at 11544.55,3217.6 h29.53 r180; Top Overlay "D32" at 11446.12,3217.6 h29.53 r180; Top Overlay "D35" at 11339.82,3217.6 h29.53 r180; Top Overlay "D34" at 11241.4,3217.6 h29.53 r180; Top Overlay "VN" at 11135.1,3217.6 h29.53 r180; Top Overlay "VP" at 11024.86,3217.6 h29.53 r180; Top Overlay "EN" at 10926.44,3217.6 h29.53 r180; Top Overlay "3V3" at 12343.76,4064.06 h29.53 r180; Top Overlay "GND" at 12245.34,4064.06 h29.53 r180; Top Overlay "D15" at 12146.91,4064.06 h29.53 r180; Top Overlay "D2" at 12028.8,4064.06 h29.53 r180; Top Overlay "D4" at 11930.38,4064.06 h29.53 r180; Top Overlay "RX2" at 11851.64,4064.06 h29.53 r180; Top Overlay "TX2" at 11753.21,4064.06 h29.53 r180; Top Overlay "D5" at 11627.23,4064.06 h29.53 r180; Top Overlay "D18" at 11536.68,4064.06 h29.53 r180; Top Overlay "D19" at 11438.25,4064.06 h29.53 r180; Top Overlay "D21" at 11339.82,4064.06 h29.53 r180; Top Overlay "RX0" at 11241.4,4064.06 h29.53 r180; Top Overlay "TX0" at 11142.97,4064.06 h29.53 r180; Top Overlay "D22" at 11044.55,4064.06 h29.53 r180; Top Overlay "D23" at 10946.12,4064.06 h29.53 r180